# EAGLE board UPL_KeyBoard (EAGLE 8.0.1)
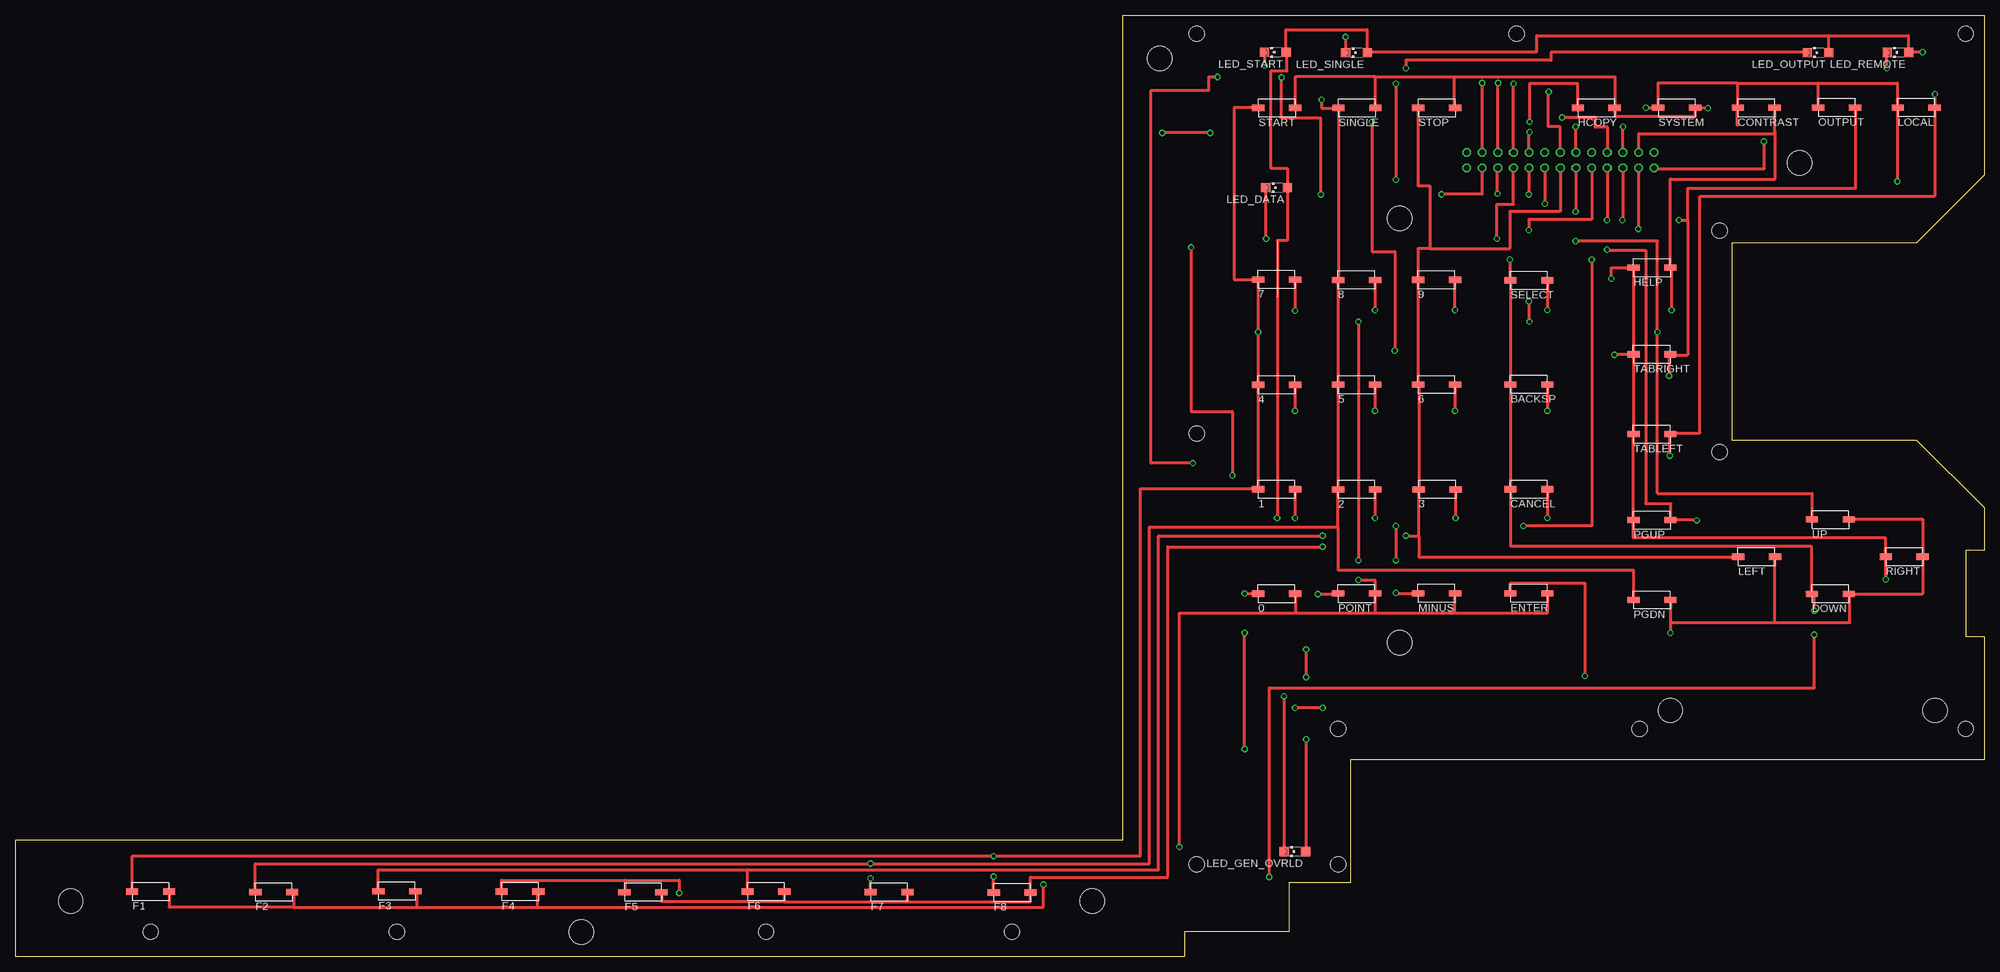
[diagram p0: board, top side]
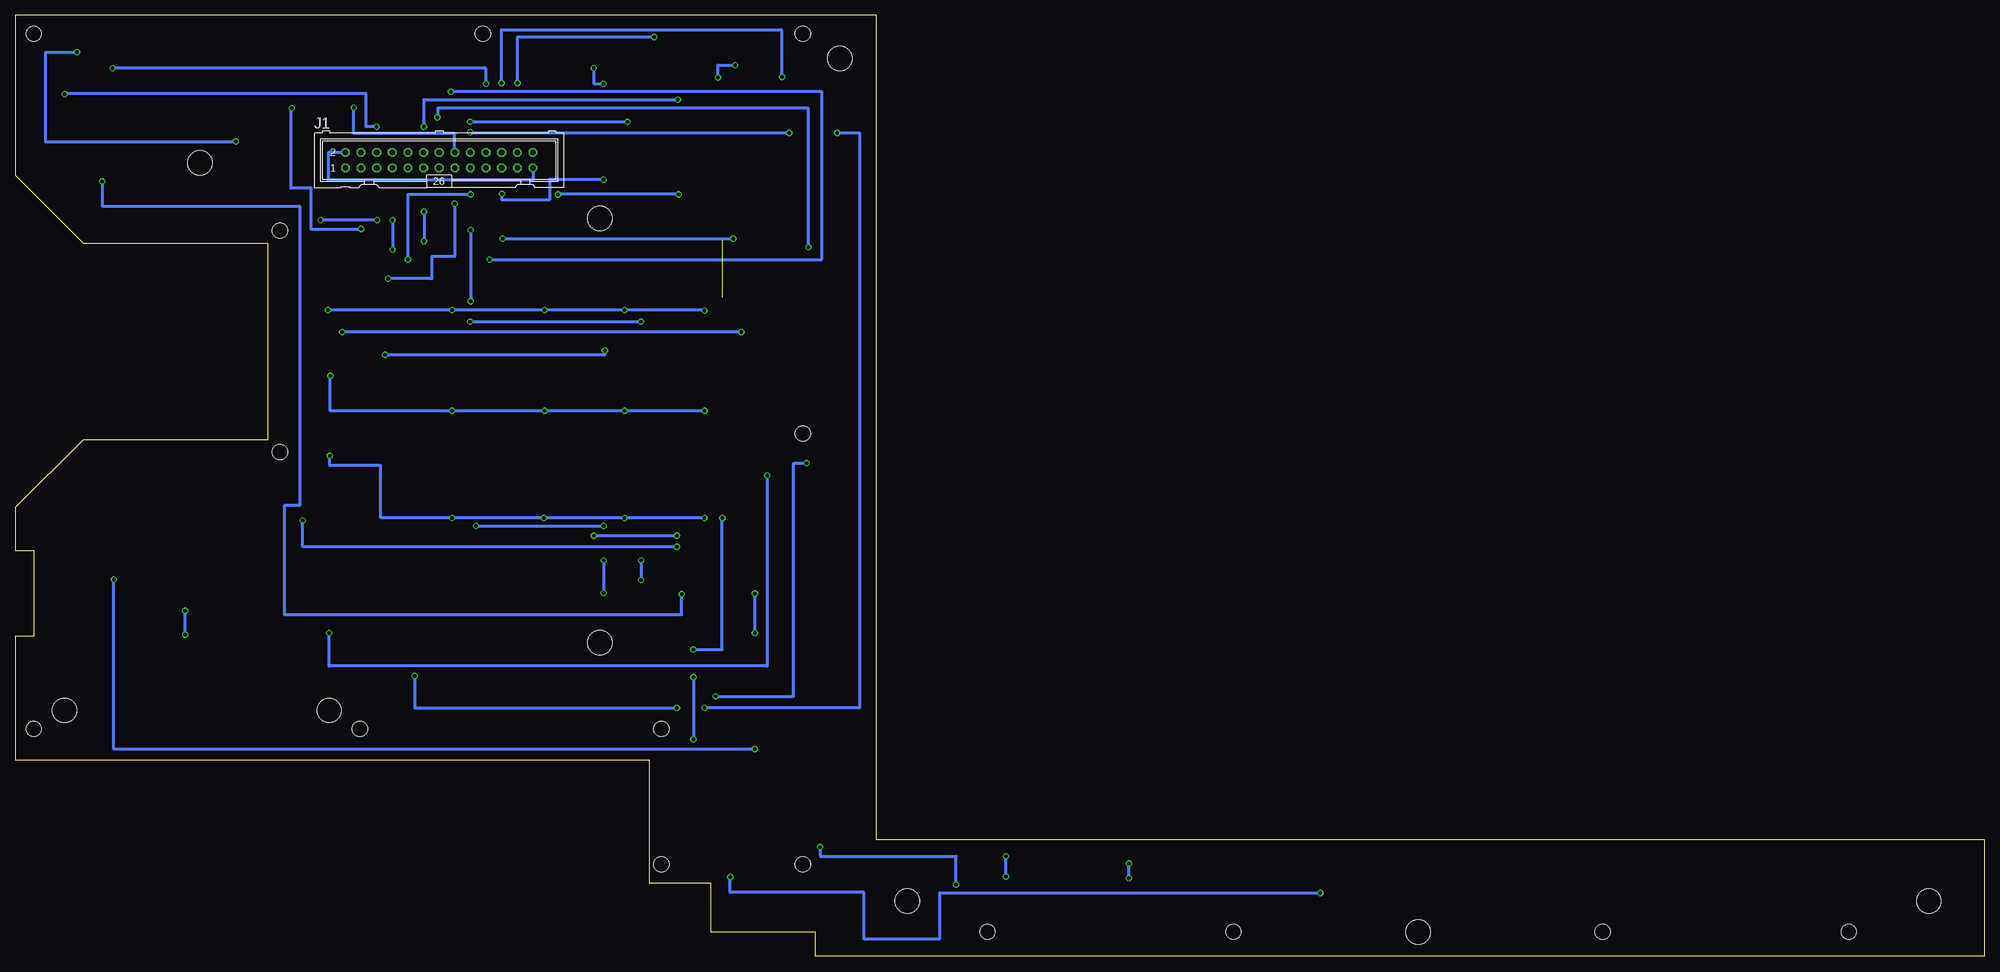
[diagram p1: board, bottom side, seen from below]

Size 320 x 153 mm. Coordinates in mm from the lower left corner, seen from the top.
Outline: 0,19 0,0 190,0 190,4 207,4 207,12 217,12 217,32 320,32 320,52 317,52 317,66 320,66 320,73 309,84 279,84 279,116 309,116 320,127 320,153 180,153 180,19 0,19
Copper layers (1*16): Top 0.035mm / dielectric 1.5mm / Bottom 0.035mm
Design rules "default": minimum track width 10mil, minimum drill 24mil, track to track 8mil, track to pad 8mil, pad to pad 8mil, via to via 8mil, smd to smd 8mil, copper to edge 40mil, drill to drill 8mil, minimum pad ring 10mil, minimum via ring 8mil, stop-mask expansion 4mil, vias tented up to drill 0mil, thermal gap 10mil
Holes 4 mm at 9,9 92,4 175,9 312,40 269,40 225,51 186,146 225,120 290,129
Holes 2.5 mm at 192,150 244,150 317,150 277,118 192,85 277,82 317,37 264,37 215,37 215,15 192,15 162,4 122,4 62,4 22,4

## Footprints (pad centres in the part's own frame; a part is rotated, then mirrored left to right if it is on the bottom)
ALPS_SKQYAFE010 = smd 2 x 1: 1 -3,0; 2 3,0
ML26 = drill 0.914 octagon: 1 -15.24,-1.27; 2 -15.24,1.27; 3 -12.7,-1.27; 4 -12.7,1.27; 5 -10.16,-1.27; 6 -10.16,1.27; 7 -7.62,-1.27; 8 -7.62,1.27; 9 -5.08,-1.27; 10 -5.08,1.27; 11 -2.54,-1.27; 12 -2.54,1.27; 13 0,-1.27; 14 0,1.27; 15 2.54,-1.27; 16 2.54,1.27; 17 5.08,-1.27; 18 5.08,1.27; 19 7.62,-1.27; 20 7.62,1.27; 21 10.16,-1.27; 22 10.16,1.27; 23 12.7,-1.27; 24 12.7,1.27; 25 15.24,-1.27; 26 15.24,1.27
CHIPLED_1206 = smd 1.5 x 1.5: A 0,-1.75; C 0,1.75

## Placement (x,y rotation side)
0  ALPS_SKQYAFE010  [ALPS_SKQYAFE010]  205,58.98 0 top
1  ALPS_SKQYAFE010  [ALPS_SKQYAFE010]  205,75.96 0 top
2  ALPS_SKQYAFE010  [ALPS_SKQYAFE010]  218,75.92 0 top
3  ALPS_SKQYAFE010  [ALPS_SKQYAFE010]  231.1,75.94 0 top
4  ALPS_SKQYAFE010  [ALPS_SKQYAFE010]  205,92.94 0 top
5  ALPS_SKQYAFE010  [ALPS_SKQYAFE010]  218,92.96 0 top
6  ALPS_SKQYAFE010  [ALPS_SKQYAFE010]  231,92.98 0 top
7  ALPS_SKQYAFE010  [ALPS_SKQYAFE010]  205,110.06 0 top
8  ALPS_SKQYAFE010  [ALPS_SKQYAFE010]  218,109.98 0 top
9  ALPS_SKQYAFE010  [ALPS_SKQYAFE010]  231,110 0 top
BACKSP  ALPS_SKQYAFE010  [ALPS_SKQYAFE010]  246,93 0 top
CANCEL  ALPS_SKQYAFE010  [ALPS_SKQYAFE010]  246,75.96 0 top
CONTRAST  ALPS_SKQYAFE010  [ALPS_SKQYAFE010]  282.95,137.98 0 top
DOWN  ALPS_SKQYAFE010  [ALPS_SKQYAFE010]  295,58.94 0 top
ENTER  ALPS_SKQYAFE010  [ALPS_SKQYAFE010]  246,59.04 0 top
F1  ALPS_SKQYAFE010  [ALPS_SKQYAFE010]  22,10.56 0 top
F2  ALPS_SKQYAFE010  [ALPS_SKQYAFE010]  42,10.48 0 top
F3  ALPS_SKQYAFE010  [ALPS_SKQYAFE010]  62,10.6 0 top
F4  ALPS_SKQYAFE010  [ALPS_SKQYAFE010]  82.03,10.56 0 top
F5  ALPS_SKQYAFE010  [ALPS_SKQYAFE010]  102,10.44 0 top
F6  ALPS_SKQYAFE010  [ALPS_SKQYAFE010]  122,10.56 0 top
F7  ALPS_SKQYAFE010  [ALPS_SKQYAFE010]  142,10.48 0 top
F8  ALPS_SKQYAFE010  [ALPS_SKQYAFE010]  162,10.4 0 top
HCOPY  ALPS_SKQYAFE010  [ALPS_SKQYAFE010]  256.95,137.96 0 top
HELP  ALPS_SKQYAFE010  [ALPS_SKQYAFE010]  266,111.98 0 top
J1  [ML26]  251.12,129.45 0 bottom
LED_DATA  [CHIPLED_1206]  204.99,124.99 90 top
LED_GEN_OVRLD  [CHIPLED_1206]  207.99,17.04 90 top
LED_OUTPUT  [CHIPLED_1206]  292.99,146.95 90 top
LED_REMOTE  [CHIPLED_1206]  305.99,146.97 90 top
LED_SINGLE  [CHIPLED_1206]  217.99,146.93 90 top
LED_START  [CHIPLED_1206]  204.79,146.99 90 top
LEFT  ALPS_SKQYAFE010  [ALPS_SKQYAFE010]  283,64.98 0 top
LOCAL  ALPS_SKQYAFE010  [ALPS_SKQYAFE010]  308.95,138 0 top
MINUS  ALPS_SKQYAFE010  [ALPS_SKQYAFE010]  231,59.02 0 top
OUTPUT  ALPS_SKQYAFE010  [ALPS_SKQYAFE010]  296.03,138 0 top
PGDN  ALPS_SKQYAFE010  [ALPS_SKQYAFE010]  266,57.96 0 top
PGUP  ALPS_SKQYAFE010  [ALPS_SKQYAFE010]  266,70.94 0 top
POINT  ALPS_SKQYAFE010  [ALPS_SKQYAFE010]  218,59 0 top
RIGHT  ALPS_SKQYAFE010  [ALPS_SKQYAFE010]  307,65 0 top
SELECT  ALPS_SKQYAFE010  [ALPS_SKQYAFE010]  246,109.92 0 top
SINGLE  ALPS_SKQYAFE010  [ALPS_SKQYAFE010]  218.05,137.94 0 top
START  ALPS_SKQYAFE010  [ALPS_SKQYAFE010]  205.03,137.94 0 top
STOP  ALPS_SKQYAFE010  [ALPS_SKQYAFE010]  231.03,137.96 0 top
SYSTEM  ALPS_SKQYAFE010  [ALPS_SKQYAFE010]  270.03,137.98 0 top
TABLEFT  ALPS_SKQYAFE010  [ALPS_SKQYAFE010]  266,84.92 0 top
TABRIGHT  ALPS_SKQYAFE010  [ALPS_SKQYAFE010]  266,97.9 0 top
UP  ALPS_SKQYAFE010  [ALPS_SKQYAFE010]  295,71.02 0 top

## Library data of the parts
0 1-9 BACKSP CANCEL CONTRAST DOWN ENTER F1-F8 HCOPY HELP LEFT LOCAL MINUS OUTPUT PGDN PGUP POINT RIGHT SELECT SINGLE START STOP SYSTEM TABLEFT TABRIGHT UP = bvk
J1 = con-harting-ml; OC_FARNELL: unknown; OC_NEWARK: unknown
LED_DATA LED_GEN_OVRLD LED_OUTPUT LED_REMOTE LED_SINGLE LED_START = adafruit

## Nets
BTN_COL_1: 1.1 4.1 7.1 F1.1 F8.1 J1.11 START.1 UP.1
BTN_COL_2: 2.1 5.1 8.1 F2.1 F7.1 J1.12 PGDN.1 SINGLE.1
BTN_COL_3: 3.1 6.1 9.1 F3.1 F6.1 J1.13 LEFT.1 STOP.1
BTN_COL_4: BACKSP.1 CANCEL.1 DOWN.1 F4.1 F5.1 J1.14 SELECT.1
BTN_COL_5: 0.1 HCOPY.1 HELP.1 J1.15 PGUP.1 RIGHT.1 TABLEFT.1 TABRIGHT.1
BTN_COL_6: CONTRAST.1 J1.16 LOCAL.1 OUTPUT.1 POINT.1 SYSTEM.1
BTN_COL_7: J1.17 MINUS.1
BTN_COL_8: ENTER.1 J1.18
BTN_ROW_1: HCOPY.2 J1.3 SINGLE.2 START.2 STOP.2 SYSTEM.2
BTN_ROW_2: 7.2 8.2 9.2 CONTRAST.2 HELP.2 J1.4 SELECT.2
BTN_ROW_3: 4.2 5.2 6.2 BACKSP.2 J1.5 OUTPUT.2 TABRIGHT.2
BTN_ROW_4: 1.2 2.2 3.2 CANCEL.2 J1.6 LOCAL.2 TABLEFT.2
BTN_ROW_5: F5.2 F6.2 F7.2 F8.2 J1.7 PGUP.2
BTN_ROW_6: DOWN.2 J1.8 LEFT.2 PGDN.2 RIGHT.2 UP.2
BTN_ROW_7: 0.2 ENTER.2 F1.2 F2.2 F3.2 F4.2 J1.9 MINUS.2 POINT.2
KEY_DET: J1.2 J1.25
LED_A: J1.1 LED_DATA.A LED_GEN_OVRLD.A LED_OUTPUT.A LED_REMOTE.A LED_SINGLE.A LED_START.A
LED_DATA: J1.19 LED_DATA.C
LED_GEN_OVRLD: J1.22 LED_GEN_OVRLD.C
LED_OUTPUT: J1.21 LED_OUTPUT.C
LED_REMOTE: J1.20 LED_REMOTE.C
LED_SINGLE: J1.24 LED_SINGLE.C
LED_START: J1.23 LED_START.C
NOTUSED_1: J1.10
NOTUSED_2: J1.26

## Tracks (layer width: path | path; a pad name or v marks a point on that pad's centre or on a via)
BTN_COL_1  (via drill 0.6)
  Top 0.5: F1.1 19,16.3 v159,16.3 182.8,16.3 182.8,76 202,76 1.1 4.1 v202,101.5 7.1 198.1,110.06 198.1,138 202.03,138 START.1 | F8.1 v159,13 | UP.1 292,75.3 266.9,75.3 v266.9,101.5 266.9,116.3 v253.6,116.3 | J1.11 253.66,121.1 v253.6,121.1
  Bottom 0.5: v159,13 v159,16.3 | v202,101.5 v266.9,101.5 | v253.6,121.1 v253.6,116.3
BTN_COL_2  (via drill 0.6)
  Top 0.5: F2.1 39,15.1 v139,15.1 184.3,15.1 184.3,69.8 215,69.8 | F7.1 v139,12.7 | 215,109.3 5.1 2.1 215,69.8 | 215,109.3 8.1 | 215,109.3 215.05,109.3 SINGLE.1 212.3,137.94 v212.3,139.3 | PGDN.1 263,62.8 215,62.8 215,69.8 | J1.12 253.6,130.72 v253.6,134.9
  Bottom 0.5: v139,12.7 v139,15.1 | v253.6,134.9 253.6,139.3 v212.3,139.3
BTN_COL_3  (via drill 0.6)
  Top 0.5: F3.1 59,14.1 119,14.1 | 119,14.1 185.8,14.1 185.8,68.4 v212.5,68.4 | F6.1 119,14.1 | 9.1 6.1 228.1,92.98 3.1 228.1,68.4 | 228.03,110 9.1 | 228.1,68.4 228.1,64.98 LEFT.1 | v226,68.4 228.1,68.4 | J1.13 251.12,121.1 242.9,121.1 242.9,115.1 229.9,115.1 | 229.9,115.1 228,115.1 9.1 | STOP.1 228,137.96 228,125.3 229.9,125.3 229.9,115.1
  Bottom 0.5: v212.5,68.4 v226,68.4
BTN_COL_4  (via drill 0.6)
  Top 0.5: F4.1 79.03,12.4 99.1,12.4 | 99.1,12.4 99.1,10.44 F5.1 | v203.8,12.9 203.8,43.7 292.4,43.7 v292.4,52.3 | v292.4,56.2 292.4,58.94 DOWN.1 291.9,58.94 291.9,66.7 243,66.7 CANCEL.1 BACKSP.1 SELECT.1 242.9,109.92 v242.9,113.3 | 99.1,12.4 107.9,12.4 v107.9,10.3 | J1.14 251.12,134.9 249.2,134.9 v249.2,140.6
  Bottom 0.5: v292.4,52.3 v292.4,56.2 | v242.9,113.3 188.9,113.3 188.9,140.6 v249.2,140.6 | v203.8,12.9 203.8,10.4 182.1,10.4 182.1,2.8 169.8,2.8 169.8,10.3 v107.9,10.3
BTN_COL_5  (via drill 0.6)
  Top 0.5: TABRIGHT.1 TABLEFT.1 PGUP.1 263,68 304,68 RIGHT.1 v304,61.3 | TABRIGHT.1 HELP.1 259.4,111.98 v259.4,110.2 | v199.8,33.7 v199.8,52.6 | v199.8,59 199.8,58.98 0.1 | J1.15 248.58,122.4 v248.6,122.4 | HCOPY.1 253.95,141.9 246.1,141.9 v246.1,135.7 | v220.5,135.7 220.5,114.6 224.2,114.6 v224.2,98.5 | v259.9,97.8 259.9,97.9 TABRIGHT.1
  Bottom 0.5: v199.8,33.7 304,33.7 v304,61.3 | v199.8,52.6 v199.8,59 | v248.6,122.4 248.6,113.8 252.3,113.8 252.3,110.2 v259.4,110.2 | v246.1,135.7 v220.5,135.7 | v224.2,98.5 224.2,97.8 v259.9,97.8
BTN_COL_6  (via drill 0.6)
  Top 0.5: 279.95,142 293.03,142 | 279.95,142 267.03,142 SYSTEM.1 265,137.98 v265,138 | 293.03,142 305.9,142 305.9,138 | OUTPUT.1 293.03,142 | 279.95,138.5 CONTRAST.1 | 279.95,138.5 279.95,142 | 279.9,135.1 279.9,138.5 279.95,138.5 | LOCAL.1 305.9,138 | 305.9,138 v305.9,126 | v211.7,58.9 215,58.9 POINT.1
  Bottom 0.5: v211.7,58.9 211.7,55.6 276.3,55.6 276.3,73.3 273.8,73.3 273.8,122 305.9,122 v305.9,126 | J1.16 248.58,133.8 265,133.8 v265,138
BTN_COL_7  (via drill 0.6)
  Top 0.5: v256.2,113.3 256.2,70 v245.1,70 | v224.4,70 v224.4,64.4 | v224.4,59.1 224.4,59.02 MINUS.1 | J1.17 246.04,123.9 v246,123.9
  Bottom 0.5: v245.1,70 v224.4,70 | v224.4,64.4 v224.4,59.1 | 256.2,123.9 v246,123.9 | 256.2,123.9 256.2,123.8 | v256.2,113.3 256.2,123.9
BTN_COL_8  (via drill 0.6)
  Top 0.5: ENTER.1 243,60.7 255.1,60.7 v255.1,45.6 | v212.5,40.4 v208,40.4 | J1.18 246.04,134 v246.1,134 | v194.2,133.9 v186.4,133.9
  Bottom 0.5: v255.1,45.6 255.1,40.4 v212.5,40.4 | v208,40.4 182.8,40.4 182.8,133.9 v186.4,133.9 | v246.1,134 246.1,133.9 v194.2,133.9
BTN_ROW_1  (via drill 0.6)
  Top 0.5: STOP.2 233.9,137.96 233.9,143 | 221.05,143 233.9,143 | 221.05,143 208.03,143 START.2 | 233.9,143 260,143 260,137.96 | 260,137.96 HCOPY.2 | SINGLE.2 221.05,143 | J1.3 263.82,118.3 v263.8,118.3 | v275.1,137.9 275.1,137.98 SYSTEM.2 273.03,136.6 260,136.6 260,137.96
  Bottom 0.5: v263.8,118.3 263.8,118.2 271.9,118.2 271.9,124.9 275.2,124.9 275.2,137.9 v275.1,137.9
BTN_ROW_2  (via drill 0.6)
  Top 0.5: 7.2 v208,105 | v234,105.1 9.2 | 8.2 v221,105.1 | v269.2,105.1 269.2,111.98 HELP.2 269,126.4 286,126.4 286,134.1 | SELECT.2 v249,105.1 | 286,134.1 286,137.98 CONTRAST.2 | J1.4 263.9,130.72 263.9,133.8 286,133.8 286,134.1
  Bottom 0.5: v208,105 208,105.1 v221,105.1 v234,105.1 v249,105.1 v269.2,105.1
BTN_ROW_3  (via drill 0.6)
  Top 0.5: 4.2 v208,88.7 | 6.2 v234,88.7 | 5.2 v221,88.7 | v268.8,94.4 268.8,97.9 TABRIGHT.2 269,97.8 271.8,97.8 271.8,119.7 | BACKSP.2 v249,88.7 | 271.8,119.7 271.8,124.9 299.1,124.9 299.1,138 OUTPUT.2 | J1.5 261.28,119.7 v261.2,119.7 | v270.4,119.7 271.8,119.7
  Bottom 0.5: v208,88.7 v221,88.7 v234,88.7 v249,88.7 268.8,88.7 v268.8,94.4 | v261.2,119.7 v270.4,119.7
BTN_ROW_4  (via drill 0.6)
  Top 0.5: 1.2 v208,71.3 | v234.1,71.3 3.2 | 2.2 v221,71.3 | v268.9,81.4 268.9,84.92 TABLEFT.2 269,85.1 273.8,85.1 273.8,123.6 311.95,123.6 LOCAL.2 311.95,140.2 v312,140.2 | CANCEL.2 v249,71.3 | J1.6 261.3,130.72 v261.3,134.9
  Bottom 0.5: v208,71.3 v221,71.3 v234.1,71.3 v249,71.3 260.6,71.3 260.6,79.8 268.9,79.8 v268.9,81.4 | v312,140.2 312,140.3 263,140.3 263,134.9 v261.3,134.9
BTN_ROW_5  (via drill 0.6)
  Top 0.5: v212.5,66.6 187.3,66.6 187.3,12.9 165,12.9 F8.2 165,8.9 144.9,8.9 | v273.3,70.9 273.3,70.94 PGUP.2 269.1,70.94 269.1,73.6 265,73.6 265,114.8 258.7,114.8 v258.7,114.9 | F5.2 105,8.9 124.9,8.9 | 124.9,8.9 144.9,8.9 | F7.2 144.9,10.48 144.9,8.9 | F6.2 124.9,10.56 124.9,8.9 | J1.7 258.74,119.7 v258.7,119.7
  Bottom 0.5: v212.5,66.6 273.3,66.6 v273.3,70.9 | v258.7,119.7 v258.7,114.9
BTN_ROW_6  (via drill 0.6)
  Top 0.5: UP.2 298,71.1 310,71.1 RIGHT.2 310,58.94 DOWN.2 298.2,58.94 298.2,54.3 286,54.3 | 286,54.3 LEFT.2 | PGDN.2 269,54.3 | 269,54.3 286,54.3 | v191.1,115.3 191.1,88.6 197.8,88.6 v197.8,78.2 | 269,54.3 v269,52.6 | J1.8 258.8,130.72 258.8,134.8 256.8,134.8 256.8,136.4 v251.4,136.4
  Bottom 0.5: v191.1,115.3 191.1,137.9 251.4,137.9 v251.4,136.4 | v197.8,78.2 197.8,47.2 269,47.2 v269,52.6
BTN_ROW_7  (via drill 0.6)
  Top 0.5: v189.2,17.8 189.2,55.8 208.1,55.8 | 208.1,55.8 208.1,58.98 0.2 | 221,55.8 POINT.2 221,61.2 v218.3,61.2 | 221,55.8 208.1,55.8 | 234,55.8 MINUS.2 | 234,55.8 221,55.8 | ENTER.2 249,55.8 234,55.8 | v246,118.1 246.04,118.1 v246,118.1 | v246,106.5 246,103.2 v246.1,103.2 | v218.3,103.2 v218.3,64.4 | F1.2 25,8 45.2,8 | 65.2,8 84.8,8 | 45.2,8 65.2,8 | F4.2 84.8,10.56 84.8,8 | F3.2 65.2,10.6 65.2,8 | F2.2 45.2,10.48 45.2,8 | 84.8,8 167.1,8 v167.1,11.7 | J1.9 256.2,119.8 246,119.8 v246,118.1
  Bottom 0.5: v246,118.1 v246,106.5 | v246.1,103.2 v218.3,103.2 | v218.3,64.4 v218.3,61.2 | v167.1,11.7 167.1,16.3 189.2,16.3 v189.2,17.8
KEY_DET
  Bottom 0.5: J1.25 235.88,126.2 269.1,126.2 269.1,130.72 J1.2
LED_A  (via drill 0.6)  (1 unrouted)
  Top 0.5: J1.1 266.36,128.1 284.3,128.1 284.3,132.5 v284.2,132.5 | v310,147 310,146.97 LED_REMOTE.A 307.74,149.7 294.7,149.7 | 294.7,149.7 294.7,146.95 LED_OUTPUT.A | 294.7,149.7 247.3,149.7 247.3,147.1 219.74,147.1 LED_SINGLE.A 219.7,146.93 219.7,150.7 206.54,150.7 LED_START.A 206.7,146.99 206.7,144 204.1,144 204.1,128.1 206.74,128.1 LED_DATA.A 206.74,116.4 205.1,116.4 v205.1,71.3 | v209.8,49.9 v209.8,45.4 | v209.8,35.3 209.8,17.04 LED_GEN_OVRLD.A | 205.1,107.2 205.2,107.2
  Bottom 0.5: v284.2,132.5 284.2,132.4 315.1,132.4 315.1,147 v310,147 | v209.8,45.4 v209.8,35.3 | v209.8,49.9 205.1,49.9 v205.1,71.3
LED_DATA  (via drill 0.6)
  Top 0.5: v240.8,116.7 240.8,122.3 243.5,122.3 J1.19 | v203.3,116.7 203.24,116.7 LED_DATA.C
  Bottom 0.5: 240.8,116.8 v240.8,116.7 v203.3,116.7
LED_GEN_OVRLD  (via drill 0.6)
  Top 0.5: LED_GEN_OVRLD.C 206.24,42.3 v206.2,42.3 | v191.4,80.2 184.6,80.2 184.6,140.8 194,140.8 194,143 v195.4,143 | J1.22 240.96,142 v241,142
  Bottom 0.5: v206.2,42.3 193.5,42.3 193.5,80.2 v191.4,80.2 | v241,142 241,150.7 195.5,150.7 195.5,143 v195.4,143
LED_OUTPUT  (via drill 0.6)
  Top 0.5: LED_OUTPUT.C 291.24,147 249.6,147 249.6,145.7 226,145.7 v226,144.4 | v224.4,141.9 v224.4,126.3 | v240.9,124 240.9,128.18 J1.21
  Bottom 0.5: v226,144.4 226,141.9 v224.4,141.9 | v224.4,126.3 233.2,126.3 233.2,123 240.9,123 v240.9,124
LED_REMOTE  (via drill 0.6)
  Top 0.5: J1.20 v243.5,141.9 | v304.2,144.4 304.2,146.97 LED_REMOTE.C
  Bottom 0.5: v243.5,141.9 243.5,144.4 v304.2,144.4
LED_SINGLE  (via drill 0.6)
  Top 0.5: J1.24 238.42,142 v238.4,142 | v216.2,149.5 216.2,146.93 LED_SINGLE.C
  Bottom 0.5: v238.4,142 238.4,149.5 v216.2,149.5
LED_START  (via drill 0.6)
  Top 0.5: J1.23 238.4,128.18 238.4,123.9 v231.8,123.9 | 203,146.99 LED_START.C 203.04,144.9 v203,144.9 | v205.8,142.9 205.8,136.3 212.2,136.3 v212.2,123.9
  Bottom 0.5: v205.8,142.9 205.8,144.9 v203,144.9 | v212.2,123.9 v231.8,123.9

## Text on the board
204bmp: BVKSound / UPL Analyzer / 20/04/2020
205bmp: BVKSound / UPL Analyzer / 20/04/2020